# Altium PCB PCBFireflyCase.PcbDoc (part 2 of 2)
Units mil, origin at the board's own origin, x right, y up, seen from the top; angles counter-clockwise.
Board outline 2748 x 1806 mil, 2 copper layers (Top Layer, Bottom Layer); 145 components, 133 nets, 518 pads, 154 vias.
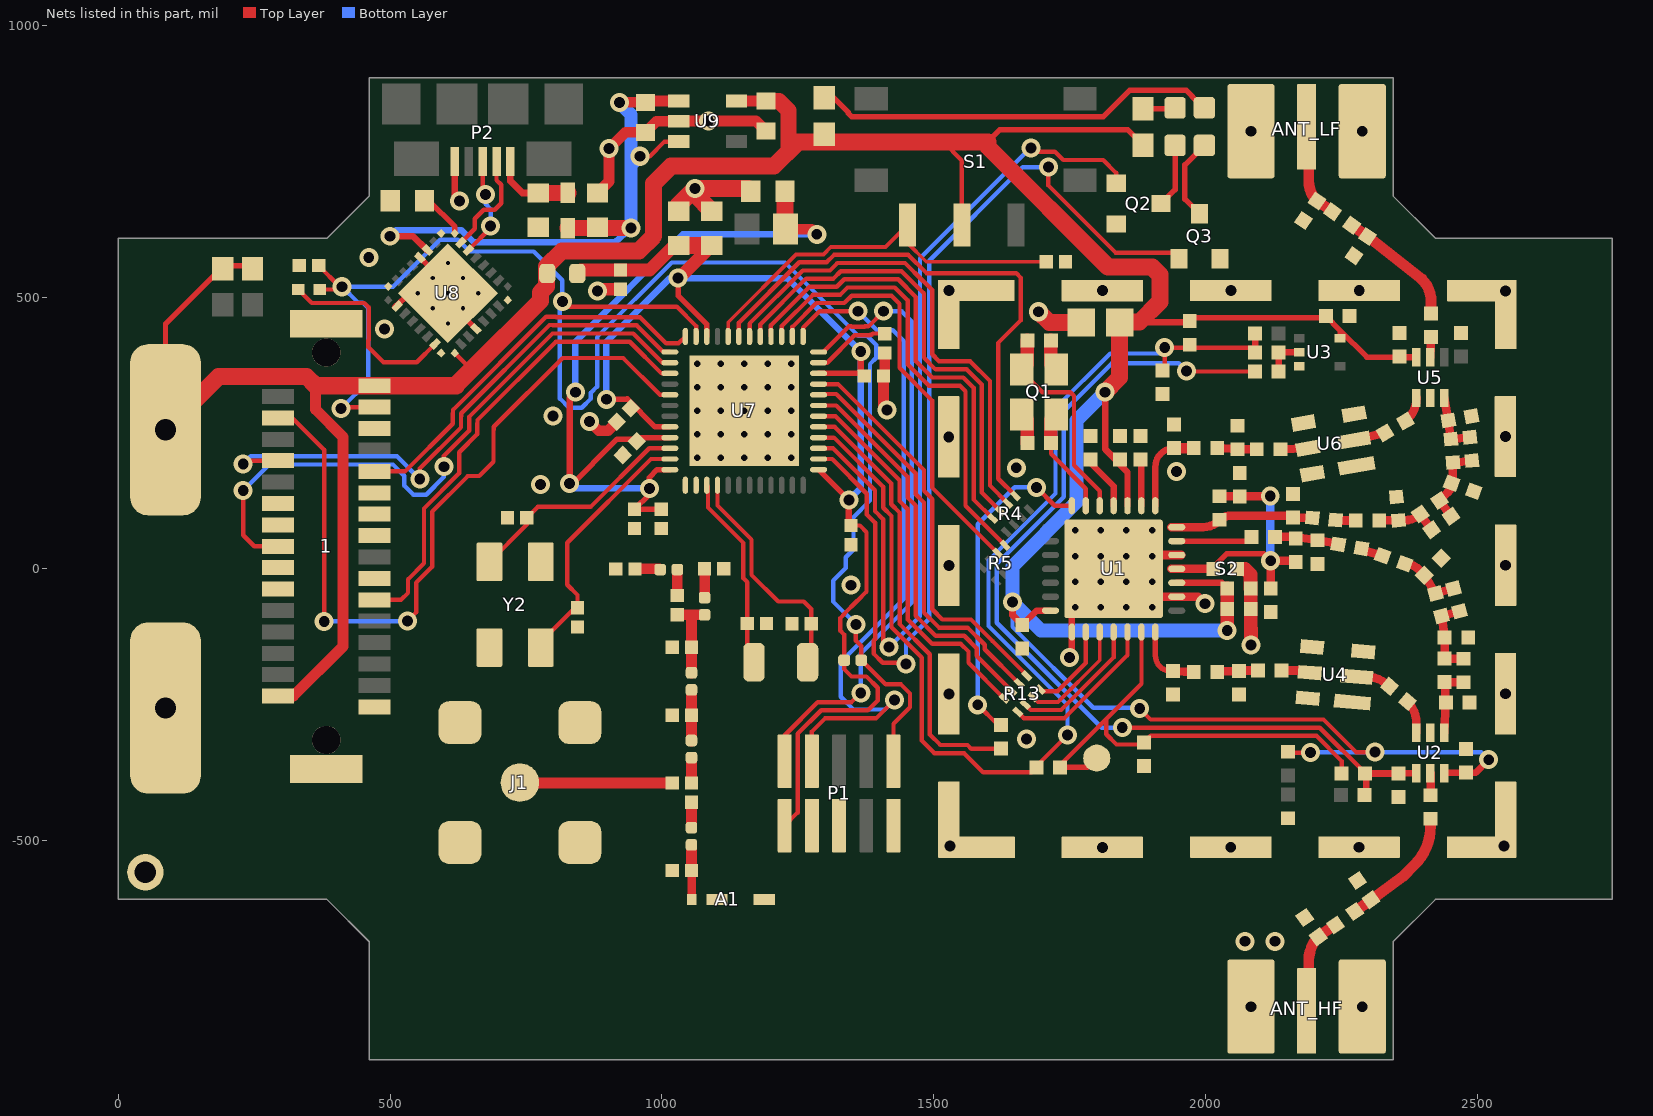
[diagram p2: the nets of this part, all layers, seen from the top]

## Via types
v1: diameter 35, hole 20, Top Layer to Bottom Layer, 100 vias
v2: diameter 23.62, hole 11.81, Top Layer to Bottom Layer, 25 vias
v3: diameter 23.62, hole 11.81, Top Layer to Bottom Layer, tented top, 16 vias
v4: diameter 19.68, hole 7.87, Top Layer to Bottom Layer, tented top, 9 vias
v5: diameter 34.48, hole 19.7, Top Layer to Bottom Layer, 4 vias

## Nets (pads, with @x,y where several pads share a name; then routed paths per layer and width w, separated by ;. In a path a pad name is that pad's centre, name@x,y a point inside that pad or via, vN(x,y) a via of type N, cw(c..) or ccw(c..) an arc to the next point about the centre after c; other vN are vias at no path point) (continued)
DIO8: Q3.1 U7.14 | length 1864.4
  Top Layer w8: U7.14@1288.39,202.12 1313.38,202.12 1377.12,138.39 1377.12,100.1 1392.32,84.9 1392.32,-129.38 1389.5,-132.19 1389.5,-155.81 1406.2,-172.5 1446.5,-172.5 v1(1449,-175) ; v1(1711,739) 1711,705.21 1834.46,581.75 1940.48,581.75 Q3.1@1951.6,570.63
  Bottom Layer w8: v1(1449,-175) 1449,-134.69 1492,-91.69 1492,567 1664,739 v1(1711,739)
DIO9: Q2.1 U7.15 | length 1656.4
  Top Layer w8: U7.15@1288.39,221.81 1314.91,221.81 1392.12,144.6 1392.12,106.31 1407.32,91.11 1407.32,-133.32 v1(1418,-144) ; v1(1679,774) 1685.5,767.5 1722.8,767.5 1738.3,752 1812,752 1835.63,728.37 Q2.1@1835.63,709.4
  Bottom Layer w8: v1(1418,-144) 1475,-87 1475,571.21 1677.79,774 v1(1679,774)
DIO10: R9.2 R10.1 R11.2 R15.2 R21.2 U7.16 | length 2180.6
  Top Layer w8: U7.16@1288.39,241.49 1316.44,241.49 1407.12,150.82 1407.12,112.52 1422.32,97.32 1422.32,-107.53 1478,-163.21 1478,-315.63 1486.8,-324.43 1501.37,-339 1556,-339 1591,-374 1680.35,-374 R21.2@1689.35,-365 ; R21.2@1688.07,-363.73 v1(1746.3,-305.5) ; R10.1@1921,364.65 1925,368.65 v1(1925,407) 1965.65,407 R9.2@1971,412.35 ; R9.2@1971,406.5 2091.35,406.5 R15.2@2091.35,398
  Top Layer w12: R15.2@2091.35,406.5 R11.2@2091.35,433
  Bottom Layer w8: v1(1746.3,-305.5) 1746.3,-250.45 1601,-105.15 1601,15.47 1724.2,138.68 1724.2,295.72 1824.74,396.26 1914.26,396.26 v1(1925,407)
DIO11: R14.2 U7.17 | length 809.7
  Top Layer w8: U7.17@1288.39,261.18 1317.97,261.18 1422.12,157.03 1422.12,118.73 1437.32,103.54 1437.32,-101.32 1493,-157 1493,-304.66 1512.34,-324 1562.21,-324 1568.87,-330.65 R14.2@1624,-330.65
DIO12: R13.8 U7.18 | length 709.6
  Top Layer w8: U7.18@1288.39,280.86 1319.5,280.86 1437.12,163.24 1437.12,124.95 1452.32,109.75 1452.32,-92.96 1497.36,-138 1550,-138 1564,-152 1564,-172.76 R13.8@1629.59,-238.35
DIO13: R13.7 U7.19 | length 721.6
  Top Layer w8: U7.19@1288.39,300 U7.19@1288.39,300.55 1321.02,300.55 1452.12,169.46 1452.12,131.16 1467.32,115.96 1467.32,-86 ; 1467.45,-86.88 1503.57,-123 1556.21,-123 1579,-145.79 1579,-159.92 R13.7@1643.51,-224.43
DIO14: R13.6 U7.20 | length 748.4
  Top Layer w8: U7.20@1288.39,320.23 1283.74,320.23 1282.18,321.8 1320.99,321.8 1467.12,175.67 1467.12,137.37 1482.32,122.18 1482.32,-80.53 1509.79,-108 1562.43,-108 1594,-139.57 1594,-148 R13.6@1656.97,-210.97
DIO15: R13.5 U7.21 | length 746.6
  Top Layer w8: U7.21@1288.39,339.92 1324.08,339.92 1482.12,181.88 1482.12,143.59 1497.32,128.39 1497.32,-74.32 1516,-93 1568.64,-93 1609,-133.36 1609,-133.43 R13.5@1671.76,-196.19
DIO16: R5.6 U7.26 | length 777.5
  Top Layer w8: U7.26@1240.16,427.52 1240.16,445.13 1284.04,489 1335.7,489 1349.3,502.61 1422.33,502.61 1437.21,487.73 1437.21,369.79 1497.12,309.88 1497.12,149.8 R5.6@1617.43,29.49
DIO17: R5.5 U7.27 | length 848.3
  Top Layer w8: U7.27@1220.48,427.52 1220.48,446.65 1277.82,504 1327.96,504 1341.56,517.61 1428.54,517.61 1452.21,493.94 1452.21,376.01 1491.21,337 1548.36,337 1558.5,326.86 1558.5,116.26 R5.5@1631.35,43.41
DIO18: R4.8 U7.28 | length 834.9
  Top Layer w8: U7.28@1200.53,427.78 1200.53,447.92 1271.61,519 1321.74,519 1335.35,532.61 1434.75,532.61 1467.21,500.15 1467.21,382.22 1497.43,352 1554.57,352 1573.5,333.07 1573.5,127.74 R4.8@1608.59,92.65
DIO19: R4.7 U7.29 | length 872.8
  Top Layer w8: U7.29@1181.11,427.52 1180.84,427.78 1180.84,449.45 1265.4,534 1315.53,534 1329.14,547.61 1440.97,547.61 1474.54,514.03 1474.91,514.03 1482.21,506.74 1482.21,388.43 1503.64,367 1560.79,367 1588.5,339.29 1588.5,140.58 R4.7@1622.51,106.57
DIO20: R4.6 U7.30 | length 909.8
  Top Layer w8: U7.30@1161.42,427.52 1161.42,451.24 1259.18,549 1309.32,549 1322.92,562.61 1447.18,562.61 1480.75,529.03 1481.12,529.03 1497.21,512.95 1497.21,394.65 1509.85,382 1567,382 1603.5,345.5 1603.5,153.42 R4.6@1636.43,120.49
DIO21: R4.5 U7.31 | length 1044.5
  Top Layer w8: U7.31@1141.74,427.52 1141.47,427.78 1141.47,452.5 1252.97,564 1303.1,564 1316.71,577.61 1453.39,577.61 1486.97,544.03 1651.72,544.03 1659.97,535.79 1659.97,456.97 1618.5,415.5 1618.5,168.19 1619,167.69 1619,165.76 R4.5@1650.35,134.41
DIO22: R20.2 S1.P1 U7.32 | length 732.6
  Top Layer w7: U7.32@1122.05,427.52 1122.05,453.59 1246.96,578.5 1297.1,578.5 1310.71,592.11 1411.39,592.11 S1.P1@1451.8,632.52 1451.8,599.71 1486.51,565 R20.2@1707.28,565
DIO23: 1.9 U7.36 | length 729.6
  Top Layer w8: 1.9@471.33,179.38 527.71,179.38 615.5,267.17 615.5,286.55 616,287.05 616,292.49 787.17,463.66 805.03,463.66 805.69,463 959.83,463 1007.83,415 1030.79,415 U7.36@1043.31,427.52
DIO24: 1.8 U7.37 | length 1051.4
  Top Layer w8: v1(230,193) 236.06,199.06 1.8@294.17,199.06 1.8@285.11,190 ; v1(554.77,165.05) 554.77,184.6 630.5,260.32 630.5,280.34 631,280.84 631,286.28 793.38,448.66 798.82,448.66 799.48,448 953.61,448 1001.61,400 U7.37@1014.77,400
  Bottom Layer w8: v1(230,193) 244,207 512.82,207 v1(554.77,165.05)
DIO25: 1.16 U7.38 | length 1175.4
  Top Layer w8: v1(230,144) 230,62 250.42,41.58 1.16@294.17,41.58 ; v1(599,188) 599,207.61 645.5,254.11 645.5,274.13 646,274.63 646,280.07 798.93,433 947.4,433 1001.11,379.29 U7.38@1014.77,379.29
  Bottom Layer w8: v1(230,144) 278,192 505.6,192 526.27,171.33 526.27,153.25 542.97,136.55 566.58,136.55 599,168.97 v1(599,188)
DIO26: 1.21 U7.39 | length 875.8
  Top Layer w8: 1.21@471.33,-56.84 520.3,-56.84 533,-44.14 533,-19.31 562.5,10.19 562.5,111.19 627.5,176.19 627.5,214.5 627.3,214.7 660.5,247.9 660.5,267.91 661,268.41 661,273.85 805.15,418 941.19,418 999.58,359.61 U7.39@1014.77,359.61
DIO28: 1.4 U7.41 | length 1418.9
  Top Layer w8: 1.4@294.17,277.8 320.11,277.8 379,218.91 v1(379,-97) ; v1(532,-96) 548,-80 548,-25.52 577.5,3.98 577.5,104.98 642.5,169.98 642.5,171 664.31,171 690.5,197.19 690.5,255.49 691,255.99 691,261.43 817.57,388 928.76,388 996.52,320.24 U7.41@1014.77,320.24
  Bottom Layer w8: v1(379,-97) 380,-96 v1(532,-96)
FTDI_3V3: C73.2 U8.16 | length 87.8
  Top Layer w10: C73.2@563.5,677 571.62,677 619.15,629.46 U8.16@619.15,617.04
FTDI_CTS: U8.8
FTDI_DTR: C76.2 U8.31 | length 365
  Top Layer w8: C76.2@331.31,514 356.16,489.16 452.7,489.16 460.68,481.18 460.68,420.88 460,420.2 460,408 488,380 549.15,380 U8.31@582.96,413.81
FTDI_RTS: U8.32
FTDI_VIO: 1.1 1.30 C3.2 C6.1 C21.2 C23.2 C26.2 C27.2 C43.2 C45.2 C75.2 FL1.2 J2.pos R7.1 R9.1 R17.1 R18.1 R22.2 R23.2 S1.P2 U1.3 U1.14 U1.24 U2.6 U3.5 U5.6 U8.1 U9.VOUT | length 7525.3
  Top Layer w8: U8.1@619.15,397.11 649.26,367 650.42,367 ; 1518,785 1551.8,751.2 S1.P2@1551.8,632.52 ; v1(1879,-257) 1899,-277 2217,-277 2277,-337 v1(2312,-337) ; R7.1@2152,-336.35 2153.65,-338 v1(2193,-338)
  Top Layer w10: J2.pos@87,255.91 87,450.85 193.61,557.46 R22.2@251,557.46 ; 1600,776 1600,786 1621.5,807.5 1857.04,807.5 R17.1@1885,779.54 ; R9.1@1971,461.8 2218.14,461.8 C6.1@2221.35,465 2247.46,438.89 ; U3.5@2247.46,424 2247.46,438.89 ; C43.2@2357,389.35 2297,389.35 2247.46,438.89
  Top Layer w11.81: C21.2@1662.99,-102.96 1689.18,-76.77 U1.14@1714.86,-76.77 ; v1@1816,325 1816,219.74 1834.4,201.35 C3.2@1845.18,201.35 ; C3.2@1842.79,191.67 1856.59,177.87 U1.3@1856.59,116.14
  Top Layer w12: v1(1645,-61) 1645,-84.97 C21.2@1662.99,-102.96 ; 1878.54,454 1969.35,454 R9.1@1971,455.65 ; U1.24@1947.14,-25.59 1947.14,-25.8 2029.8,-25.8 C27.2@2040,-36 ; C43.2@2357,389.35 2388.02,389.35 U5.6@2388.08,389.4 ; U2.6@2439.26,-376.04 2440.64,-374.65 C45.2@2479,-374.65 2497.35,-374.65 v1(2521,-351)
  Top Layer w19.68: U9.VOUT@1137.3,860.7 C75.2@1187.74,860.7
  Top Layer w20: 1.30@294.17,-234.01 322.15,-234.01 413.5,-142.66 413.5,242.71 363.29,292.92 363.29,336.86
  Top Layer w25.59: v1(2040,-113.31) C26.2@2040,-74 C27.2@2040,-36
  Top Layer w29.53: C75.2@1191.67,860.75 1215.49,860.75 1233.1,843.13 1233.1,767.73
  Top Layer w31.5: J2.pos@87,255.91 184.79,353.7 346.45,353.7 363.29,336.86 1.1@471.33,336.86 621.86,336.86 ; 621.07,337.65 650.42,367 776.75,493.33 776.75,508.67 788.01,519.93 788.01,556.56 816.2,584.75 957.68,584.75 985,612.07 985,709 1017.13,741.13 1206.5,741.13 1250.38,785 R18.1@1299,785 ; R18.1@1299,799.54 R18.1@1299,785 ; 1600,776 1821,555 1902,555 1916,541 1916,491.46 1878.54,454 1846,454 1842,458 1842,352 v1(1815,325) ; 1600,785 1518,785 R18.1@1299,785
  Bottom Layer w8: v1(1645,-61) 1645,-106.72 1793.64,-255.36 1877.36,-255.36 v1(1879,-257) ; v1(2193,-338) 2194,-337 v1(2312,-337) 2507,-337 v1(2521,-351)
  Bottom Layer w25.59: v1(1815,325) 1763,273 1763,124.61 1764,123.61 1645,4.61 v1(1645,-61) 1697.31,-113.31 v1(2040,-113.31)
GND: 1.31 1.M3 1.M4 A1.2 A1.3 ANT_HF.2 ANT_LF.2 C1.1 C2.1 C3.1 C4.1 C5.1 C6.2 C7.1 C8.1 C10.1 C11.1 C13.1 C15.1 C16.1 C17.1 C21.1 C22.2 C23.1 C25.1 C26.1 C27.1 C29.1 C30.1 C32.1 C34.1 C35.1 C37.1 C40.1 C41.1 C42.2 C43.1 C45.1 C46.1 C47.1 C48.1 C49.1 C50.1 C51.1 C52.1 C53.1 C54.1 C55.1 C56.1 C57.1 C58.1 C62.1 C63.1 C64.1 C65.1 C66.1 C67.1 C68.1 C69.1 C70.1 C71.1 C72.1 C73.1 C74.1 C75.1 GND.1 J1.2 J1.3 J1.4 J1.5 J2.neg L13.1 P1.3 P1.5 P1.9 P2.Pin5 Q1.2 Q1.4 Q2.2 Q3.2 R8.2 R10.2 R20.1 S2.SHIELD U1.15 U1.23 U1.26 U1.29 U2.2 U3.3 U4.1 U4.3 U4.4 U4.6 U5.2 U6.1 U6.3 U6.4 U6.6 U7.49 U8.4 U8.17 U8.20 U8.24 U8.26 U8.33 U9.GND Y2.2 Y2.4 | length 1913.6
  Top Layer w10: U8.26@508.37,481.41 537.03,507.07 v4(606.63,507.07) ; U8.20@555.12,572.49 606.63,520.99 v4(606.63,507.07) ; U8.4@658.13,441.65 606.63,493.15 v4(606.63,507.07)
  Top Layer w12: P2.Pin5@619.21,749.69 619.21,685.79 v1(628,677) ; v5(1750,-163) 1754.23,-158.77 U1.15@1754.23,-116.14 U1.29@1754.23,-76.77
  Top Layer w15.75: U1.29@1900,-51.18 1986.18,-51.18 v1(1999,-64) ; U1.29@1900,25.59 U1.26@1955.59,25.59
  Top Layer w19.68: v1(867,271) 884,254 901,254 C50.1@917.47,270.47 ; C72.1@881.58,691.3 903,712.72 v1(903,773) 933.04,803.04 C74.1@970.05,803.04 990.3,823.3 U9.GND@1031,823.3 1031.7,824 v1(1086,824) 1173.31,824 C75.1@1191.67,805.63
  Top Layer w20: C68.1@1410,397.28 1410,357.28 C49.1@1407.72,355 1407.72,298.28 v1(1414,292) ; U1.29@1754.23,-76.77 v3(1760.13,-70.87) v3(1807.38,-23.62) U1.29@1831,0
  Top Layer w23.62: v1(882,511) 885.28,514.28 C25.1@924,514.28
  Top Layer w25: Q1.4@1662.45,284.2 1672.39,274.26 C1.1@1672.39,231.32 ; C2.1@1715.6,420.23 1715.6,376.73 Q1.2@1725.44,366.88
  Top Layer w25.59: C35.1@2057.65,0 2073,0 2083,-10 2083,-35.69 C27.1@2083.31,-36 C26.1@2083.31,-74 v1(2084,-140)
  Top Layer w31.5: C52.1@1031,657.99 1031,670 v1(1061,700) ; C51.1@1092,657.99 1061,688.99 v1(1061,700) ; C53.1@1163.5,695 1158.5,700 v1(1061,700) ; v1(1693,473) 1713,453 C23.1@1771.57,453
  other v1: 2073,-685 2128,-685 1810.23,-512.18 2046.53,-511.96 2282.68,-511.96 1530,-510 2549,-510 1671,-313 1527.91,-230.1 2551.85,-229.57 1348,-30 1528,6.17 2551.94,6.7 777,155 1947,179 1652,186 1527.8,242.95 2551.75,243.48 800,281 490,441 2552,511 1528,512 1810.31,511.85 2046.6,512.07 2282.75,512.07 461,573
  other v2: 1064.96,204.09 1108.27,204.09 1151.58,204.09 1194.89,204.09 1238.19,204.09 1064.96,247.4 1108.27,247.4 1151.58,247.4 1194.89,247.4 1238.19,247.4 1064.96,290.71 1108.27,290.71 1151.58,290.71 1194.89,290.71 1238.19,290.71 1064.96,334.01 1108.27,334.01 1151.58,334.01 1194.89,334.01 1238.19,334.01 1064.96,377.32 1108.27,377.32 1151.58,377.32 1194.89,377.32 1238.19,377.32
  other v3: 1807.38,-70.87 1854.62,-70.87 1901.87,-70.87 1760.13,-23.62 1854.62,-23.62 1901.87,-23.62 1760.13,23.62 1807.38,23.62 1854.62,23.62 1901.87,23.62 1760.13,70.87 1807.38,70.87 1854.62,70.87 1901.87,70.87
  other v4: 606.63,451.4 578.79,479.23 634.46,479.23 550.95,507.07 662.3,507.07 578.79,534.91 634.46,534.91 606.63,562.75
JTAG_TCK: P1.4 U7.25 | length 1285.6
  Top Layer w8: U7.25@1259.85,427.52 1259.85,443.6 1290.25,474 v1(1361,474) ; P1.4@1276,-353.94 1276,-299 1300,-275 1394,-275 v1(1428,-241)
  Bottom Layer w8: v1(1361,474) 1396,439 1425,439 1445,419 1445,-55.48 1329,-171.48 1329,-235 1352.5,-258.5 1410.5,-258.5 v1(1428,-241)
JTAG_TMS: P1.2 U7.24 | length 1153.2
  Top Layer w8: P1.2@1226,-353.94 1226,-305.92 1286.92,-245 1349,-245 v1(1366,-228) ; U7.24@1288.39,398.98 1296.98,398.98 1344,446 1348.7,446 1349.2,445.5 1372.8,445.5 1373.3,446 1380,446 v1(1408,474)
  Bottom Layer w8: v1(1366,-228) 1366,-155.69 1460,-61.69 1460,455 1441,474 v1(1408,474)
MCU_NRESET: 1.3 C58.2 C76.1 P1.10 R12.1 U7.35 | length 3119.2
  Top Layer w8: C58.2@368.72,558 407.72,519 v1(412,519) 407,514 C76.1@370.68,514 ; v1(410,295) 412.49,297.49 1.3@471.33,297.49 ; v1(817,492) 826.5,482.5 1027.36,482.5 1063,446.86 U7.35@1063,427.52 ; v1(1357,-102) 1357,-132 1366.75,-141.75 R12.1@1366.75,-168 1367.52,-168 1412.02,-212.5 1439.8,-212.5 1456.5,-229.19 1456.5,-254.5 1426,-285 P1.10@1426,-353.94
  Bottom Layer w8: v1(410,295) 460,345 460,480 450,490 441,490 v1(412,519) 505.53,519 592.27,605.73 624.73,605.73 646.78,583.69 764.31,583.69 817,531 v1(817,492) 812.5,487.5 812.5,313.19 829.19,296.5 852.81,296.5 869.5,313.19 869.5,323.81 881,335.31 881,426.31 1018.19,563.5 1226.54,563.5 1361.54,428.5 1377.8,428.5 1394.5,411.81 1394.5,388.19 1383,376.69 1383,125.69 1352.5,95.19 1352.5,35.4 1338.5,21.4 1338.5,1.6 1315,-21.9 1315,-60 v1(1357,-102)
MCU_RX0: 1.18
MCU_TX0: 1.19
MISO: 1.13
MISO_SX: R13.3 U1.17 | length 210.6
  Top Layer w7: R13.3@1682.49,-235.57 1691.92,-245 1728.44,-245 1805.41,-168.03 U1.17@1805.41,-116.14
MOSI: 1.12
MOSI_SX: R13.2 U1.18 | length 253.4
  Top Layer w8: R13.2@1668.57,-249.49 1678.58,-259.5 1734.45,-259.5 1831,-162.95 U1.18@1831,-116.14
NetA1_1: A1.1 C64.2 R16.1 | length 96.4
  Top Layer w15.75: A1.1@1054.77,-607.98 C64.2@1054.77,-558.4
  Top Layer w19.68: R16.1@1054.42,-508.06 1054.42,-554.75 C64.2@1054.52,-554.75
NetANT_HF_1: ANT_HF.1 C47.2 L14.2 | length 176.3
  Top Layer w20: ANT_HF.1@2190,-810 2190,-720.88 cw(c2255.46,-720.88) 2209.17,-674.59 L14.2@2239.17,-655.18
NetANT_LF_1: ANT_LF.1 C41.2 L11.2 | length 175
  Top Layer w20: ANT_LF.1@2190,813 2190,713.32 ccw(c2242.15,713.32) C41.2@2205.27,676.44 L11.2@2233.61,657.02
NetC4_2: C4.2 U1.2 | length 85.2
  Top Layer w11.81: U1.2@1882.18,116.14 C4.2@1882.18,201.35
NetC5_2: C5.2 U1.4 | length 93
  Top Layer w11.81: C5.2@1790.59,192.45 1831,152.03 U1.4@1831,116.14
NetC7_2: C7.2 C8.2 C35.2 L1.1 L2.2 U1.25 | length 512.9
  Top Layer w10: C35.2@2014.35,0 2014.35,3.5 2038.64,27.8 2107.2,27.8 v1(2120,15)
  Top Layer w15.75: U1.25@1937,0 U1.25@1947.14,0 C35.2@2014.35,0 ; L1.1@2026,133.65 2118.65,133.65 v5(2119,134) ; C7.2@2062.31,132.65 C7.2@2063,133.35 ; C8.2@2120,-36.35 v1(2120,15) 2165.65,15 L2.2@2166,15.35
  Bottom Layer w15.75: v5(2119,134) 2119,16 v1(2120,15)
NetC9_1: C9.1 L4.1 | length 40.3
  Top Layer w15.75: C9.1@2286.92,35.4 L4.1@2325.65,24.41
NetC9_2: C9.2 C10.2 L2.1 L3.1 | length 114.7
  Top Layer w15.75: L3.1@2131.31,59 2166,58.65 C10.2@2206,52.65 C9.2@2245.08,46.6
NetC11_2: C11.2 C12.2 L4.2 L5.1 | length 117.3
  Top Layer w15.75: L4.2@2366.35,9.59 cw(c2366.35,-27.67) 2392.7,-1.32 C11.2@2402.69,-11.31 L5.1@2423,-45 C12.2@2456.4,-36.08
NetC12_1: C12.1 C13.2 C14.2 L5.2 L6.1 | length 147.9
  Top Layer w15.75: C12.1@2467.6,-77.92 L5.2@2434.21,-86.83 C13.2@2439.95,-126.06 L6.1@2440,-165 C14.2@2474.7,-165.22
NetC14_1: C14.1 C15.2 L6.2 U2.1 | length 127.8
  Top Layer w15.75: U2.1@2439.26,-301.23 C15.2@2442.3,-246.06 L6.2@2440,-208.31 C14.1@2474.7,-208.53
NetC16_2: C16.2 L7.1 U1.21 | length 130.1
  Top Layer w10: U1.21@1907.77,-116.14 1907.77,-159.17 ccw(c1936.6,-159.17) C16.2@1936.6,-188
  Top Layer w15.75: C16.2@1936.6,-188 1939.99,-188.13 L7.1@1978.35,-189.65
NetC17_2: C17.2 C18.2 L7.2 | length 75.8
  Top Layer w15.75: L7.2@2021.65,-189.65 cw(c2025.65,-193.65) 2025.65,-188 C17.2@2062,-188 cw(c2064.76,-190.76) 2064.76,-186.86 C18.2@2096.66,-186.86
NetC18_1: C18.1 U4.5 | length 53
  Top Layer w15.75: C18.1@2139.96,-186.86 2182.22,-186.86 cw(c2182.22,-200.6) U4.5@2191.94,-190.88
NetC19_1: C19.1 U2.3 | length 61.7
  Top Layer w15.75: C19.1@2371.59,-243.92 cw(c2331.78,-283.73) 2388.08,-283.73 U2.3@2388.08,-301.23
NetC19_2: C19.2 U4.2 | length 64.9
  Top Layer w15.75: U4.2@2278.22,-198.43 2295.8,-198.43 cw(c2295.8,-258.69) C19.2@2338.41,-216.08
NetC20_1: C20.1 C46.2 L14.1 | length 232.5
  Top Layer w20: L14.1@2274.65,-630.34 2302.88,-610.25 2363,-566 2384.71,-544.29 ccw(c2314,-473.58) 2414,-473.58 C20.1@2414,-459.65
NetC20_2: C20.2 U2.5 | length 40.4
  Top Layer w15.75: U2.5@2413.67,-376.04 2414,-376.37 C20.2@2414,-416.35
NetC28_1: C28.1 L8.1 | length 37.1
  Top Layer w15.75: C28.1@2239.57,90.11 ccw(c2242.26,92.8) 2242.26,89 L8.1@2276.35,89
NetC28_2: C28.2 C29.2 L1.2 U1.28 | length 267
  Top Layer w15.75: U1.28@1937,76.77 1995.64,76.77 ccw(c1995.64,119.7) 2026,89.35 cw(c2046.89,68.46) 2046.89,98 2145.35,98 cw(c2145.35,78.7) 2159,92.35 cw(c2162.72,88.63) 2162.72,93.89 C28.2@2196.43,93.89
NetC30_2: C30.2 C31.2 L8.2 L9.1 | length 114.4
  Top Layer w15.75: L8.2@2319.65,89 cw(c2320.69,87.96) 2320.69,89.43 C30.2@2354.89,89.43 2367.07,89.43 ccw(c2367.07,128.93) L9.1@2395,101 C31.2@2416,72
NetC31_1: C31.1 C32.2 C33.2 L9.2 L10.1 | length 185.1
  Top Layer w15.75: C31.1@2451.48,96.84 L9.2@2430.47,125.84 2446.01,141.38 ; C33.2@2490,199 L10.1@2455.11,195.57 2455.11,163.35 cw(c2446.71,163.35) C32.2@2452.65,157.41 ; 2446.02,141.39 ccw(c2429.99,157.41) C32.2@2452.65,157.41 ; 2446.02,141.39 ccw(c2429.99,157.41) C32.2@2452.65,157.41 ; 2446.01,141.38 ccw(c2429.99,157.41) C32.2@2452.65,157.41
NetC33_1: C33.1 C34.2 L10.2 U5.3 | length 111.9
  Top Layer w15.75: U5.3@2439.26,314.6 C34.2@2446.68,273.24 L10.2@2451.34,238.71 C33.1@2486.23,242.14
NetC36_1: C36.1 U6.5 | length 50.9
  Top Layer w15.75: C36.1@2137.65,220 U6.5@2188.47,221.8
NetC36_2: C36.2 C37.2 L12.2 | length 72.8
  Top Layer w15.75: L12.2@2021.65,222.65 C37.2@2059,220 C36.2@2094.35,220
NetC38_1: C38.1 U5.1 | length 49
  Top Layer w15.75: C38.1@2367.75,271.83 2372.77,276.85 ccw(c2335.02,314.6) U5.1@2388.41,314.6
NetC38_2: C38.2 U6.2 | length 58
  Top Layer w15.75: U6.2@2273.77,236.84 C38.2@2330.25,250.17
NetC39_1: C39.1 C40.2 L11.1 | length 230.6
  Top Layer w20: L11.1@2269.08,632.18 C40.2@2297.84,611.62 2398,533 cw(c2356.96,491.96) 2415,491.96 C39.1@2415,469.65
NetC39_2: C39.2 U5.5 | length 37
  Top Layer w15.75: U5.5@2413.67,389.4 C39.2@2415,426.35
NetC57_2: C57.2 L16.2 | length 47
  Top Layer w19.68: C57.2@950.47,-0.01 995.61,-0.01 L16.2@996.94,-1.33
NetC59_1: C59.1 C62.2 L17.1 L19.2 | length 156.5
  Top Layer w19.68: C59.1@1028.45,-84.45 1054.54,-84.43 ; C62.2@1054.54,-143.9 1054.54,-84.43 ; L17.1@1054.61,-191.6 C62.2@1054.61,-144.81 ; L19.2@1078.69,-84.43 1054.54,-84.43
NetC60_1: C60.1 J1.1 | length 280.3
  Top Layer w19.68: J1.1@739,-394 C60.1@1019.28,-394
NetC60_2: C60.2 C61.2 L18.2 | length 46.8
  Top Layer w19.68: C61.2@1054.52,-394.03 L18.2@1054.55,-347.24
NetC61_1: C61.1 R16.2 | length 46.8
  Top Layer w19.68: R16.2@1054.42,-475.53 C61.1@1054.42,-428.74
NetC63_2: C63.2 L17.2 L18.1 | length 93.6
  Top Layer w19.68: L18.1@1054.45,-316.62 C63.2@1054.45,-269.84 ; C63.2@1054.68,-268.8 L17.2@1054.68,-222.01
NetC66_2: C66.2 U7.3 Y1.1 | length 361.5
  Top Layer w8: U7.3@1082.68,153.9 1084.82,151.76 1084.82,112.85 1150,47.67 1150,-17.21 1157.1,-24.32 C66.2@1157.1,-100.58 1157.1,-159.07 Y1.1@1169.61,-171.58
NetC67_2: C67.2 U7.4 Y1.2 | length 427.2
  Top Layer w8: U7.4@1102.37,153.9 1102.37,116.52 1165,53.88 1165,-11 1214,-60 1261,-60 1274.72,-73.72 C67.2@1274.72,-101 1274.72,-164.89 Y1.2@1268.03,-171.58
NetC68_2: C68.2 U7.23 | length 144
  Top Layer w8: U7.23@1288.39,379.29 1304.29,379.29 1355,430 1382.21,430 1383.21,431 1386.21,431 1388.21,433 1409.72,433 C68.2@1410,432.72
NetC71_2: C71.2 L20.1 P2.Pin1 | length 150.9
  Top Layer w12: P2.Pin1@721.57,749.69 721.57,713.43 743.6,691.4 C71.2@772.66,691.4
  Top Layer w29.53: C71.2@772.66,691.4 L20.1@826.68,691.4
  Top Layer w31.5: L20.1@826.68,691.4 L20.1@826.96,691.69
NetD1_A: D1.A R17.2 | length 59.7
  Top Layer w10: R17.2@1885,846.46 1942.4,846.46 D1.A@1944,848.06
NetD1_C: D1.C Q2.3 | length 117.6
  Top Layer w10: Q2.3@1918.31,672 1944,697.69 D1.C@1944,779
NetD2_A: D2.A R18.2 | length 748.8
  Top Layer w10: R18.2@1299,866.46 1316.54,866.46 1342.56,840.44 1342.56,838.37 1349.59,831.35 1811.57,831.35 1860.34,880.11 1964.83,880.11 1975.68,869.26 1975.68,868.31 1995.94,848.06 D2.A@1998,848.06
NetD2_C: D2.C Q3.3 | length 151.8
  Top Layer w10: Q3.3@1989,653.31 1962,680.31 1962,743 D2.C@1998,779
NetL3_2: L3.2 U1.27 | length 141.2
  Top Layer w10: U1.27@1947.14,51.18 L3.2@2088.35,51.18
NetL12_1: L12.1 L13.2 U1.1 | length 162.4
  Top Layer w11.81: U1.1@1907.77,116.14 1907.77,187.77 cw(c1942,187.77) L13.2@1942,222
  Top Layer w20: L13.2@1942,222 1978.35,222 L12.1@1978.35,222.65
NetR6_2: R6.2 R15.1 U3.2 | length 73.2
  Top Layer w12: R6.2@2134.65,363 R15.1@2134.65,398 2135.06,398.41 U3.2@2172.65,398.41
NRESET_SX: R14.1 U1.7 | length 605.9
  Top Layer w8: v1(1581,-250) 1618.35,-287.35 R14.1@1624,-287.35 ; v1(1689,150) 1722.86,116.14 U1.7@1754.23,116.14
  Bottom Layer w8: v1(1581,-250) 1581,82 1649,150 v1(1689,150)
NSS_SX: R13.1 U1.19 | length 297
  Top Layer w8: R13.1@1654.65,-263.41 1665.74,-274.5 1740.66,-274.5 1856.59,-158.57 U1.19@1856.59,-116.14
PB4: 1.14
PB5: 1.15
PE2: 1.20
PG1: 1.5
RF_N: C65.2 L19.1 U7.2 | length 53.4
  Top Layer w19.68: L19.1@1078.69,-52.94 C65.2@1078.68,0.46
RF_P: C59.2 L16.1 U7.1 | length 47.7
  Top Layer w19.68: C59.2@1028.45,-49.01 L16.1@1028.45,-1.35
RXTX_LINK: C22.1 R1.2 R2.1 R6.1 U2.4 | length 1764.9
  Top Layer w8: v1(1847,-292) 2210.31,-292 R1.2@2295.31,-377 ; v1@1965,363 R6.1@2091.35,363 ; C22.1@2355,-376.35 C22.1@2355.31,-376.04
  Top Layer w12: R2.1@2295.31,-420 2295.31,-377 2295.96,-376.35 C22.1@2355,-376.35 ; C22.1@2355.31,-376.04 U2.4@2388.08,-376.04
  Bottom Layer w8: v1(1847,-292) 1809.07,-292 1616,-98.93 1616,9.26 1739.2,132.46 1739.2,289.51 1827.85,378.15 1950.85,378.15 v1(1965,364)
RXTX_RF: R3.2
RXTX_RF_SX: R1.1 R3.1 R21.1 RXTX_RFMDOD.1 U1.20 | length 898.4
  Top Layer w8: R21.1@1732.65,-360.87 1817.5,-276.02 ; U1.20@1882.18,-116.14 1882.18,-211.34 1817.5,-276.02 ; R1.1@2250.35,-376 2250.35,-353.25 2204.09,-307 1899.35,-307 R3.1@1887,-319.35 1883.35,-323 1836.28,-323 1817.5,-304.22 1817.5,-276.02
  Top Layer w10: R21.1@1732.65,-365 1783,-365 RXTX_RFMDOD.1@1800,-348
SCK: 1.11
SCK_SX: R13.4 U1.16 | length 163.3
  Top Layer w8: R13.4@1696.41,-221.65 1699.76,-225 1727.93,-225 1779.82,-173.11 U1.16@1779.82,-116.14
USB_5V: C72.2 C74.2 L20.2 U8.19 U9.EN U9.VIN | length 1118
  Top Layer w8: v1(960,759) 978,759 1004.89,785.89 U9.EN@1031,785.89
  Top Layer w11.81: v5(500,612) 542.3,612 567.89,586.41 U8.19@569.04,586.41
  Top Layer w19.68: v1(922.08,857.94) 922.3,858.16 C74.2@970.05,858.16 972.58,860.7 U9.VIN@1031,860.7
  Top Layer w29.53: L20.2@826.96,626.73 C72.2@880.01,626.73 ; C72.2@882.89,627 v1(943.02,627)
  Top Layer w31.5: C72.2@881.58,628.31 C72.2@882.89,627
  Bottom Layer w11.81: v5(500,612) 511.21,623.21 631.17,623.21 653.78,600.59 913.43,600.59 v1(943.02,627)
  Bottom Layer w23.62: v1@921.62,857.48 943.02,836.09 943.02,742.02 ; v1(943.02,627) 943.02,742.02 ; v1(960,759) 943.02,742.02
  Bottom Layer w29.53: v1@921.62,857.48 v1(922.08,857.94)
USB_D_N: P2.Pin2 U8.15 | length 195.5
  Top Layer w8: U8.15@630.53,600.09 656,625.55 656,644 672.5,660.5 692.5,660.5 704.5,672.5 704.5,706.5 695.98,715.02 P2.Pin2@695.98,749.69
USB_D_P: P2.Pin3 U8.14 | length 184.4
  Top Layer w8: U8.14@644.21,586.41 v1@686.4,628.6 ; P2.Pin3@670.39,749.69 670.39,694.61 v1(676,689)
  Bottom Layer w8: v1(676,689) 676,671 685,662 v1(685,631)
VDDR: C53.2 C54.2 C55.2 C56.2 L15.2 U7.45 U7.48 | length 1457
  Top Layer w10: v1@829,150 917.73,238.73 949.32,238.73 C54.2@953.53,234.53 960.49,241.49 U7.45@1014.77,241.49 ; C55.2@949.9,109.77 977,136.87 v1(977,148) 977,168 991.44,182.44 U7.48@1014.77,182.44 ; C55.2@949.93,109.74 C56.2@998.84,109.74
  Top Layer w12: v1(830.5,157) 830.5,314.5 v1(841,325)
  Top Layer w19.68: L15.2@1227.43,625 1275.43,625 v1(1285,615.43)
  Top Layer w31.5: L15.2@1226.5,625.94 C53.2@1226.5,695
  Bottom Layer w12: v1@831,148 v1(977,148) ; v1(841,325) 841,418 1038.43,615.43 v1(1285,615.43)
VDDS: C25.2 C48.2 C49.2 C50.2 C51.2 C52.2 FL1.1 P1.1 R12.2 U7.13 U7.22 U7.34 U7.44 | length 2590
  Top Layer w8: P1.1@1226,-472.06 1249.8,-448.26 1249.8,-303.33 1293.13,-260 1379,-260 1397,-242 1397,-218.69 1376.3,-198 1349,-198 1335.25,-184.25 R12.2@1335.25,-168 1335.25,-120.56 1328.5,-113.81 1328.5,-90.19 1335.25,-83.44 1335.25,-82.75 1359.5,-58.5 1359.8,-58.5 1376.5,-41.81 1376.5,67.5 1364.28,79.72 C48.2@1345,79.72
  Top Layer w10: v1(898,312) 935,312 936,313 987.82,261.18 U7.44@1014.77,261.18 ; v1(1030,535) 1030,502.49 1082.68,449.81 U7.34@1082.68,427.52 ; U7.13@1288.39,182.44 1288.56,182.44 v1(1344,127) ; U7.22@1288.39,359.61 C49.2@1367.68,359.61
  Top Layer w12: v1(1344,127) 1344,80.72 C48.2@1345,79.72 ; v1(1366,400) 1366,361.28 1367.68,359.61 C49.2@1372.28,355
  Top Layer w23.62: FL1.1@844.44,543.28 850.87,549.72 C25.2@924,549.72 977.72,549.72 1023,595 C52.2@1031,595 ; v1@1037,540 C51.2@1092,595
  Top Layer w31.5: C52.2@1031,595 C51.2@1092,595
  Bottom Layer w12: v1(898,312) 898,418 1015,535 v1(1030,535) 1230.93,535 1233.43,532.5 1233.5,532.5 v1(1366,400) 1366,149 v1(1344,127)
X24M_N: C70.2 U7.46 Y2.3 | length 425.6
  Top Layer w8: Y2.3@682.88,12.86 751.72,81.7 C70.2@751.72,94 771.72,114 869,114 976.81,221.81 U7.46@1014.77,221.81
X24M_P: C69.2 U7.47 Y2.1 | length 483.8
  Top Layer w8: Y2.1@777.37,-144.62 777.37,-134.39 840.47,-71.28 C69.2@845,-71.28 845,-48 826,-29 826,48 980.12,202.12 U7.47@1014.77,202.12
XTA_N: C1.2 Q1.1 U1.6 | length 198.7
  Top Layer w8: C1.2@1715.7,231.32 1715.7,211.63 1779.82,147.51 U1.6@1779.82,116.14
  Top Layer w25: C1.2@1715.7,231.32 1715.7,274.46 Q1.1@1725.44,284.2
XTA_P: C2.2 Q1.3 U1.5 | length 396.2
  Top Layer w8: Q1.3@1660.28,364.72 1700,325 1751.38,325 1758.09,318.29 1758.09,190.44 1805.41,143.13 U1.5@1805.41,116.14
  Top Layer w25: Q1.3@1662.45,366.88 1672.29,376.72 C2.2@1672.29,420.23
pads on no net: 1.2 P1.6 P1.7 P1.8 P2.Pin4 P2.Shield1 P2.Shield2 P2.Shield3 P2.Shield4 P2.Shield5 P2.Shield6 R5.1 R5.2 R5.7 R5.8 S1.1 S1.2 S1.3 S1.4 S1.P3 U1.22 U3.1 U8.3 U8.5 U8.6 U8.7 U8.12 U8.13 U8.18 U8.23 U8.25 U8.27 U8.28 U8.29 U9.NC

## Polygon pours and split planes (outlines as drawn)
GND on Bottom Layer "Bottom GND Plane" (solid, remove dead copper, pour order 41): 0,0 0,608 384,608 462,686 462,903 2345,903 2345,686 2423,608 2748,608 2748,-608 2423,-608 2345,-686 2345,-903 462,-903 462,-686 384,-608 0,-608 0,0
GND on Top Layer "Top GND Plane" (solid, remove dead copper, pour order 40): 0,0 0,608 384,608 462,686 462,903 2345,903 2345,686 2423,608 2748,608 2748,-608 2423,-608 2345,-686 2345,-903 462,-903 462,-686 384,-608 0,-608 0,0

## Keep-outs
Keep-Out Layer:
  the board outline again, w7

## Other copper
Top Layer:
  rectangle net GND: 1081.76,-632.39 1121.13,-598
  rectangle net GND: 1168.37,-632.39 1207.74,-598
  rectangle net NetA1_1: 1046,-632.39 1064,-599
  region net RF_N: 1058.13,143.82 1067.86,143.82 1073.82,74.06 1090.82,3.85 1066.5,3.85
  region net RF_P: 1048.23,143.72 1039.21,3.82 1017.59,3.83 1032.63,74.06 1038.37,143.7
  pour cut-out: 1940,-619 1940,-903 384,-903 384,-619
  text "CJH '16" at 2721,-530 h25 r90
Bottom Layer:
  pour cut-out: 1940,-619 1940,-903 384,-903 384,-619

## Silkscreen, mask and mechanical layers (free items; w line width, h text height)
Top Overlay:
  text "NC" at 1937,-364 h29.53 r90
  text "WiSE Lab / CMU LoRaBug v1" at 502,-811 h40

## Text inside footprints (layer, text, board x,y; h text height)
1: Top Overlay "2" at 233.14,395.91 h49.6 r270; Top Overlay "30" at 229.2,-261.57 h49.6 r270; Top Overlay "31" at 481.17,-277.32 h49.6 r270
A1: Mechanical 11 "2" at 1098.29,-607.98 h7.87 r180; Mechanical 11 "3" at 1184.91,-607.98 h7.87 r180; Mechanical 11 "1" at 1051.83,-607.98 h7.87 r180; Mechanical 17 "MICHAL BLACHUCKI" at 635.89,-667.31 h7.87 r180; Mechanical 18 "ROBERT MITAL" at 635.89,-683.06 h7.87 r180; Mechanical 19 "2011-09-19" at 635.89,-653.53 h7.87 r180
FL1: Mechanical 11 "1" at 847.59,543.28 h7.87 r180; Mechanical 11 "2" at 792.47,543.28 h7.87 r180; Mechanical 17 "ROBERT GABRYSIAK" at 872,533.04 h7.87 r180; Mechanical 18 "JOHAN ANDERSSON" at 870.42,544.07 h7.87 r180; Mechanical 19 "2009-09-17" at 849.95,556.27 h7.87 r180
J1: Mechanical 11 "1" at 739,-396.15 h7.87 r90; Mechanical 11 "2" at 849.24,-506.39 h7.87 r90; Mechanical 11 "3" at 849.24,-285.91 h7.87 r90; Mechanical 11 "5" at 628.76,-506.39 h7.87 r90; Mechanical 11 "4" at 628.76,-285.91 h7.87 r90; Mechanical 17 "MICHAL BLACHUCKI" at 744.75,-418 h7.87 r90; Mechanical 18 "ROBERT MITAL" at 729,-418 h7.87 r90; Mechanical 19 "2011-07-18" at 758.53,-418 h7.87 r90
J2: Top Overlay "+" at 152,410 h60
L16: Mechanical 11 "1" at 1028.04,-2.51 h7.87 r180; Mechanical 11 "2" at 996.94,-2.12 h7.87 r180; Mechanical 17 "ROBERT GABRYSIAK" at 1063.86,-9.6 h7.87 r180; Mechanical 18 "JOHAN ANDERSSON" at 1063.86,0.25 h7.87 r180; Mechanical 19 "2009-09-17" at 1045.36,12.45 h7.87 r180
L17: Mechanical 11 "1" at 1055.73,-191.4 h7.87 r270; Mechanical 11 "2" at 1055.34,-222.5 h7.87 r270; Mechanical 17 "ROBERT GABRYSIAK" at 1062.82,-155.57 h7.87 r270; Mechanical 18 "JOHAN ANDERSSON" at 1052.97,-155.57 h7.87 r270; Mechanical 19 "2009-09-17" at 1040.77,-174.07 h7.87 r270
L18: Mechanical 11 "1" at 1055.73,-316.14 h7.87 r270; Mechanical 11 "2" at 1055.34,-347.24 h7.87 r270; Mechanical 17 "ROBERT GABRYSIAK" at 1062.82,-280.31 h7.87 r270; Mechanical 18 "JOHAN ANDERSSON" at 1052.97,-280.31 h7.87 r270; Mechanical 19 "2009-09-17" at 1040.77,-298.82 h7.87 r270
L19: Mechanical 11 "1" at 1079.87,-53.33 h7.87 r270; Mechanical 11 "2" at 1079.47,-84.43 h7.87 r270; Mechanical 17 "ROBERT GABRYSIAK" at 1086.95,-17.5 h7.87 r270; Mechanical 18 "JOHAN ANDERSSON" at 1077.11,-17.5 h7.87 r270; Mechanical 19 "2009-09-17" at 1064.91,-36.01 h7.87 r270
R12: Mechanical 11 "1" at 1366.35,-162.88 h7.87 r180; Mechanical 11 "2" at 1335.25,-162.49 h7.87 r180; Mechanical 17 "ROBERT GABRYSIAK" at 1395,-209 h7.87 r180; Mechanical 18 "JOHAN ANDERSSON" at 1397,-221 h7.87 r180; Mechanical 19 "2009-09-17" at 1360,-228 h7.87 r180
R16: Mechanical 11 "1" at 1059.64,-507.1 h7.87 r90; Mechanical 11 "2" at 1060.03,-476 h7.87 r90; Mechanical 17 "ROBERT GABRYSIAK" at 1046.25,-542.93 h7.87 r90; Mechanical 18 "JOHAN ANDERSSON" at 1056.09,-542.93 h7.87 r90; Mechanical 19 "2009-09-17" at 1068.3,-524.42 h7.87 r90
Y1: Mechanical 11 "1" at 1169.61,-174.73 h7.87; Mechanical 11 "2" at 1268.03,-174.73 h7.87; Mechanical 17 "JOANNA MINKIEWICZ" at 1161.73,-183.39 h7.87; Mechanical 18 "ROBERT MITAL" at 1161.73,-167.64 h7.87; Mechanical 19 "2011-03-09" at 1161.73,-197.17 h7.87